# Altium PCB PCB1_test.PcbDoc
Units mm, origin at the board's own origin, x right, y up, seen from the top; angles counter-clockwise.
Board outline 145 x 100 mm, 2 copper layers (Top Layer, Bottom Layer); 78 components, 96 nets, 335 pads, 35 vias.
Unrouted connection lines stored in the file: 47.
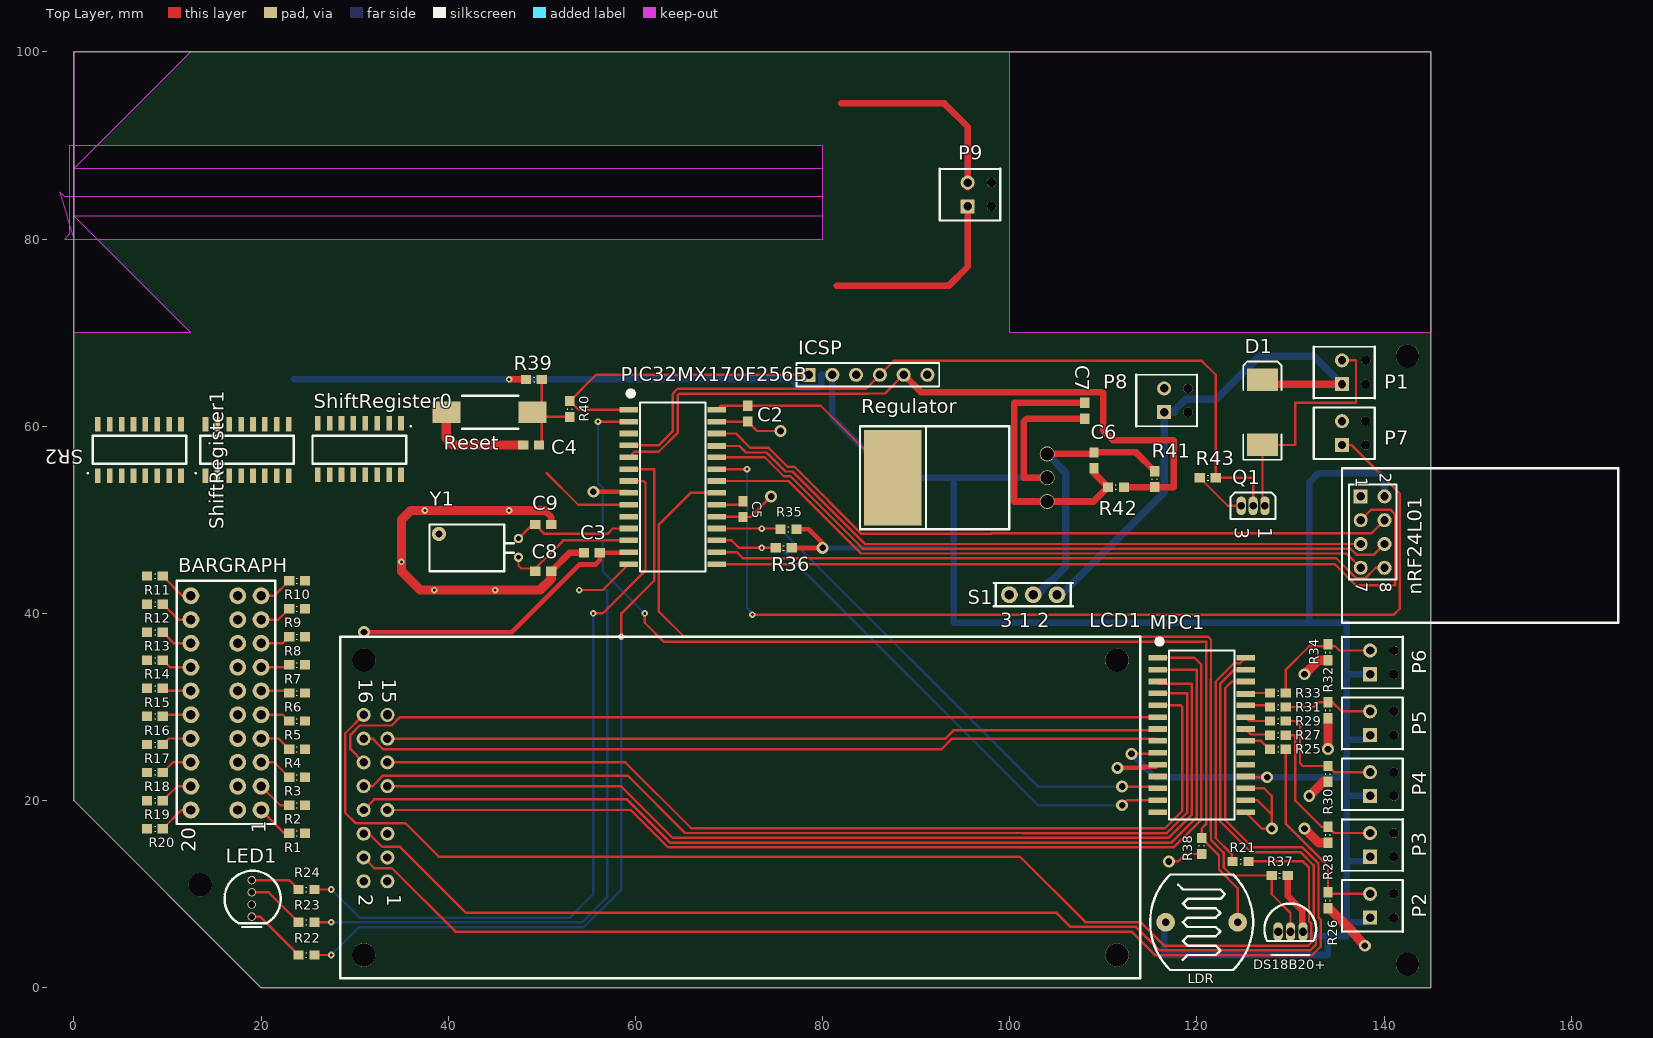
[diagram p0: Top Layer view]
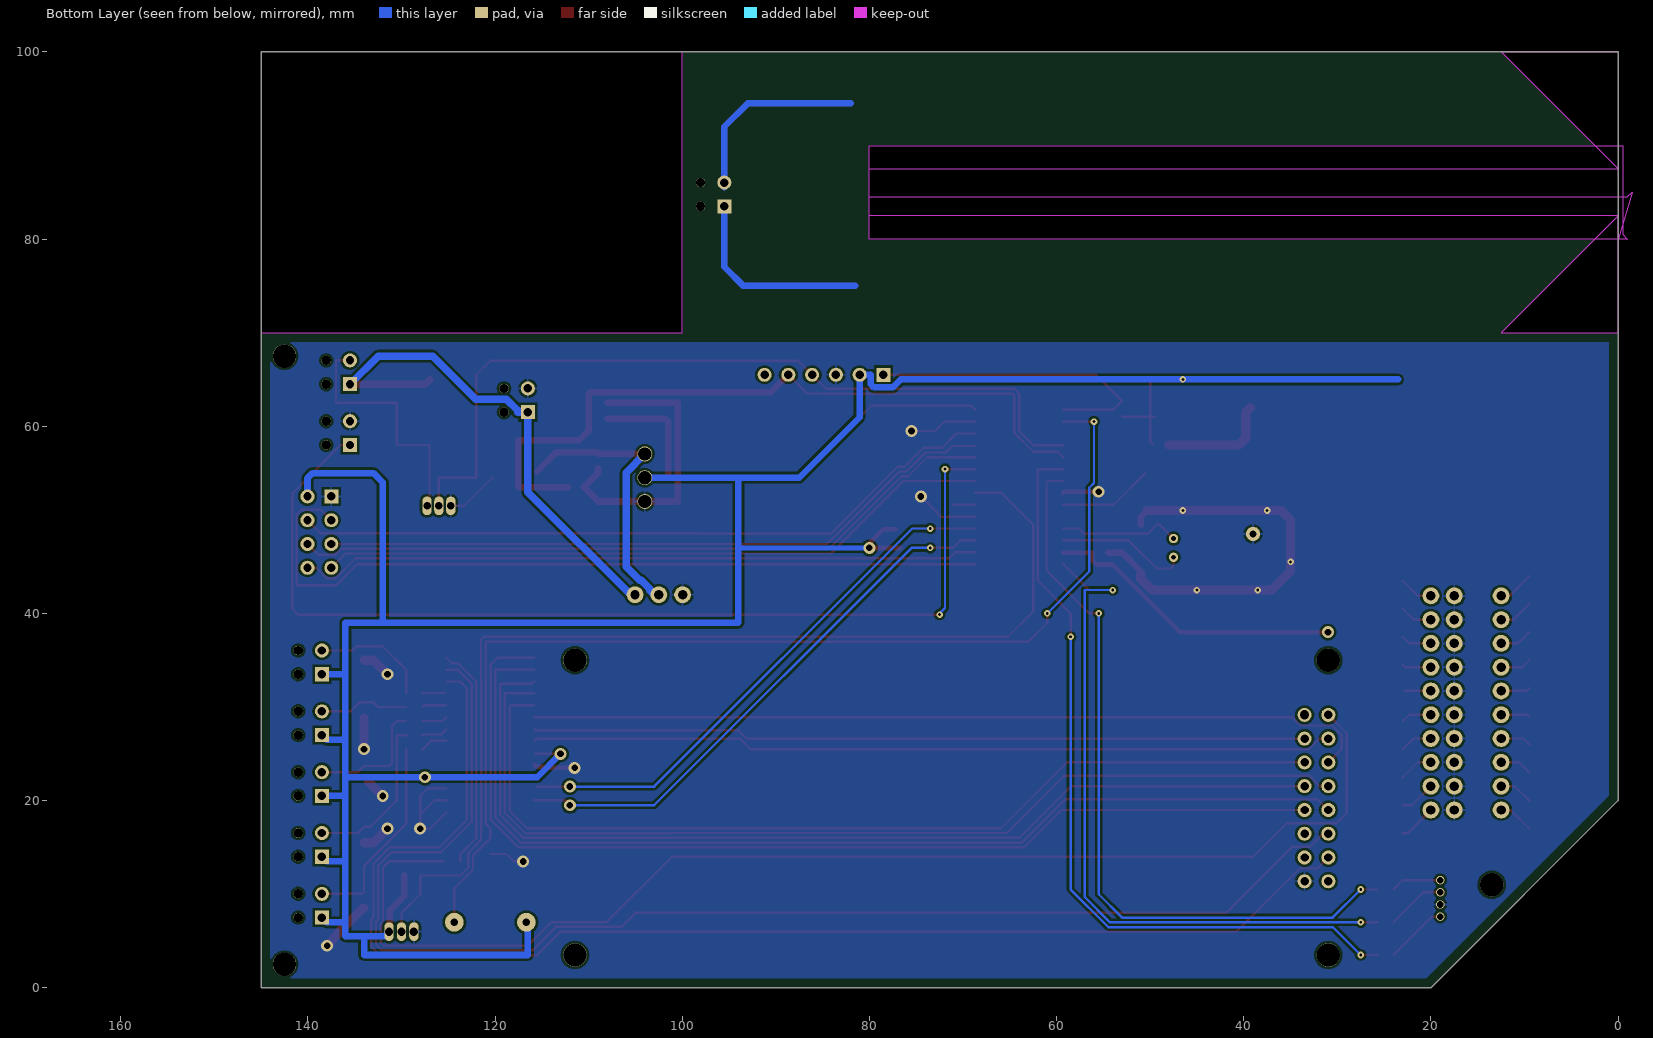
[diagram p1: Bottom Layer view, seen from below]

## Layer stack, top to bottom
Top Solder: solder mask 0.0102, Solder Resist, Dk 3.5
Top Layer: signal copper 0.0356
Dielectric 1: dielectric 0.32, FR-4, Dk 4.8
Bottom Layer: signal copper 0.0356
Bottom Solder: solder mask 0.0102, Solder Resist, Dk 3.5

## Board outline
20,0 145,0 145,100 0,100 0,20
cut-out: 80,80 80,90 -0.5,90 -0.5,80.5 -1,80
cut-out: 0,80 80,80 80,84.5 -1,84.5 -1.5,85
cut-out: 0,87.5 0,82.5 80,82.5 80,87.5
cut-out: 145,70 100,70 100,100 145,100
cut-out: 0,82.5 12.5,70 0,70
cut-out: 0,87.5 12.5,100 0,100
board region "Default Layer Stack Region": 145,70 145,0 20,0 0,20 0,70
board region "Default Layer Stack Region": 0,70 0,100 145,100 145,70

## Design rules (kind name [scope] priority, off if disabled: settings)
Clearance [All] p1: gap=0.254
PlaneClearance [All] p1 off: clearance=0.508
PlaneConnect isvia [IsVia] p1: planeconnectstyle=NoConnect reliefexpansion=0.508 reliefentries=4 reliefconductorwidth=0.254 reliefairgap=0.254
PlaneConnect all [IsPad] p2: planeconnectstyle=Relief reliefexpansion=0.508 reliefentries=4 reliefconductorwidth=0.254 reliefairgap=0.254
PolygonConnect PolygonConnect_2 [IsVia vs InNet('GND')] p1: connectstyle=Direct reliefconductorwidth=0.254 reliefentries=2 polygonreliefangle="90 Angle" airgapwidth=0.254
PolygonConnect PolygonConnect_1 [IsPad vs InNet('GND')] p2: connectstyle=Relief reliefconductorwidth=0.254 reliefentries=4 polygonreliefangle="90 Angle" airgapwidth=0.254
PolygonConnect [All] p3 off: connectstyle=Relief reliefconductorwidth=0.254 reliefentries=4 polygonreliefangle="90 Angle" airgapwidth=0.254
RoutingVias [All] p1: holewidth=0.711 width=1.27 viastyle="Through Hole" minholewidth=0.711 minwidth=1.27 maxholewidth=0.711 maxwidth=1.27
SolderMaskExpansion [All] p1: expansion=0.102
UnpouredPolygon [All] p1: allowunpoured=FALSE
Width [All] p1: maxlimit=20 minlimit=0.2 preferedwidth=0.254
27 further rules are at their usual default settings.

## Classes and differential pairs
net class SPI[0..3]: SPI0 SPI1 SPI2 SPI3
net class RD[0..2]: RD0 RD1 RD2
net class LED[0..2]: LED0 LED1 LED2
net class LCD[0..10]: LCD0 LCD1 LCD2 LCD3 LCD4 LCD5 LCD6 LCD7 LCD8 LCD9 LCD10
net class I2C[0..1]: I2C0 I2C1
net class ELECTRODE[0..4]: ELECTRODE0 ELECTRODE1 ELECTRODE2 ELECTRODE3 ELECTRODE4
component class TempSensor: DS18B20+ R37
component class SoilMoisture: P7
component class Pump: D1 P1 PUMP Q1 R43
component class Power: C6 C7 P8 R41 R42 Regulator S1
component class PIC32MX170F256B: C2 C3 C4 C5 C8 C9 ICSP PIC32MX170F256B R39 R40 Reset Y1
component class ModRadio: Nrf24L01
component class MCP23017: R35 R36
component class LumSensor: LDR R38
component class "Level Sensor": P2 P3 P4 P5 P6 R25 R26 R27 R28 R29 R30 R31 R32 R33 R34
component class LedAlert: R22 R23 R24
component class "Ecran LCD": R21
component class BarGraph: BARGRAPH R1 R2 R3 R4 R5 R6 R7 R8 R9 R10 R11 R12 R13 R14 R15 R16 R17 R18 R19 R20 ShiftRegister0 ShiftRegister1 SR2

## Components (designator, comment, footprint, x,y, rotation, side; value= is the part's Value field where it differs from the comment)
BARGRAPH "BargraphRG" BargraphRG 17.5,19 r90 top
C2 "0.1uF" C0603 72,60.5 r90 top
C3 "0.1uF" C0603 54.5,46.5 r0 top
C4 "0.1uF" C0603 48,58 r0 top
C5 "10uF" C0603 71.5,52 r270 top
C6 "10uF" C0603 109,55.5 r90 top
C7 "100nF" C0603 108,62.5 r270 top
C8 "15pF" C0603 51,44.5 r180 top
C9 "15pF" C0603 51,49.5 r180 top
D1 "Diode" SMC 127,61.5 r90 top
DS18B20+ "DS18B20+" DS18B20+ 130,6 r0 top
ICSP "Program/Debug" HDR1X6 78.5,65.5 r0 top
LCD1 "FC1602B04-FHYYBW-91LE" FC1602B04-FHYYBW-91LE 33.5,19 r270 top
LDR "NSL-4962" NSL-4962 120.5,7 r0 top
LED1 "LED_RGB" LED1 19,9.5 r270 top
MPC1 "MPC23017" MCP23017 120.5,29 r270 top
nRF24L01 "Nrf24L01" NRF24L01 137.5,52.5 r270 top (schematic designator Nrf24L01)
P1 "Header Pompe" BORNIER 135.5,64.5 r90 top
P2 "Header 2" BORNIER 138.5,7.5 r90 top
P3 "Header 2" BORNIER 138.5,14 r90 top
P4 "Header 2" BORNIER 138.5,20.5 r90 top
P5 "Header 2" BORNIER 138.5,27 r90 top
P6 "Header 2" BORNIER 138.5,33.5 r90 top
P7 "Header Sensor" BORNIER 135.5,58 r90 top
P8 "Header BAT" BORNIER 116.5,61.5 r90 top
P9 "Header 2" BORNIER 95.5,83.5 r90 top
PIC32MX170F256B "PIC32MX170F256B" PIC32MX170F256B 64,55.5 r270 top (schematic designator PIC32)
Q1 "IRFZ24N" E3 126,51.5 r270 top
R1 "220Ω" R0603 23,16.5 r0 top
R2 "220Ω" R0603 23,19.5 r0 top
R3 "220Ω" R0603 23,22.5 r0 top
R4 "220Ω" R0603 23,25.5 r0 top
R5 "220Ω" R0603 23,28.5 r0 top
R6 "220Ω" R0603 23,31.5 r0 top
R7 "220Ω" R0603 23,34.5 r0 top
R8 "220Ω" R0603 23,37.5 r0 top
R9 "220Ω" R0603 23,40.5 r0 top
R10 "220Ω" R0603 23,43.5 r0 top
R11 "160Ω" R0603 9.5,44 r180 top
R12 "160Ω" R0603 9.5,41 r180 top
R13 "160Ω" R0603 9.5,38 r180 top
R14 "160Ω" R0603 9.5,35 r180 top
R15 "160Ω" R0603 9.5,32 r180 top
R16 "160Ω" R0603 9.5,29 r180 top
R17 "160Ω" R0603 9.5,26 r180 top
R18 "160Ω" R0603 9.5,23 r180 top
R19 "160Ω" R0603 9.5,20 r180 top
R20 "160Ω" R0603 9.5,17 r180 top
R21 "600Ω" R0603 125.5,13.5 r180 top
R22 "140Ω" R0603 24,3.5 r0 top
R23 "20Ω" R0603 24,7 r0 top
R24 "30Ω" R0603 24,10.5 r0 top
R25 "1KΩ" R0603 129.5,25.5 r180 top
R26 "10MΩ" R0603 134,8.5 r90 top
R27 "1KΩ" R0603 129.5,27 r180 top
R28 "10MΩ" R0603 134,15.5 r90 top
R29 "1KΩ" R0603 129.5,28.5 r180 top
R30 "10MΩ" R0603 134,22 r90 top
R31 "1KΩ" R0603 129.5,30 r180 top
R32 "10MΩ" R0603 134,28.8 r90 top
R33 "1KΩ" R0603 129.5,31.5 r180 top
R34 "10MΩ" R0603 134,35 r90 top
R35 "4.7KΩ" R0603 75.5,49 r0 top
R36 "4.7KΩ" R0603 75,47 r0 top
R37 "4.7K" R0603 128,12 r0 top
R38 "Res1" R0603 120.5,16 r270 top
R39 "10K" R0603 50,65 r180 top
R40 "1K" R0603 53,61 r90 top
R41 "2M" R0603 115.5,53.5 r90 top
R42 "1M" R0603 110.5,53.5 r0 top
R43 "10K" R0603 122,54.5 r180 top
Regulator "LM1117D-33" VoltReg3.3V 104,54.5 r90 top
Reset "SW-PB" Reset 49,61.5 r180 top
S1 "SW-On/Off" "Switch on/off" 102.5,42 r180 top
ShiftRegister0 "74HC595" SN74HC595D 30.5,57.5 r180 top (schematic designator SR0)
ShiftRegister1 "74HC595" SN74HC595D 18.5,57.5 r0 top (schematic designator SR1)
SR2 "74HC595" SN74HC595D 7,57.5 r0 top
Y1 "32.768kHz" XTAL 47.5,47 r90 top

## Footprints (in the part's own frame and the unit in brackets; to place one, negate y for a bottom-side part, rotate by r counter-clockwise, add the part's x,y. Pads: shape width x height; smd on the part's side, far side on the other; paste and mask are expansions set on the pad)
BargraphRG [mm]
  round 1.8 hole 1: 1(0,-2.5) 2(2.54,-2.5) 3(5.1,-2.5) 4(7.64,-2.5) 5(10.18,-2.5) 6(12.72,-2.5) 7(15.26,-2.5) 8(17.8,-2.5) 9(20.34,-2.5) 10(22.88,-2.5) 11(22.88,5) 12(20.34,5) 13(17.8,5) 14(15.26,5) 15(12.72,5) 16(10.18,5) 17(7.64,5) 18(5.1,5) 19(2.54,5) 20(0,5) 21(0,0) 22(2.54,0) 23(5.1,0) 24(7.64,0) 25(10.18,0) 26(12.72,0) 27(15.26,0) 28(17.8,0) 29(20.34,0) 30(22.88,0)
  silkscreen extent -1.5,-4 24.5,6.5
BORNIER [mm]
  rect 1.5x1.5 hole 0.9: 1(0,0)
  round 1.5 hole 0.9: 2(2.54,0)
  round 1 hole 1: NC(0,-2.54) NC(2.54,-2.54)
  silkscreen extent -1.5,-3.5 4,3
C0603 [mm]
  rect 1.1x1 smd: 1(0,0) 2(1.7,0)
DS18B20+ [mm] "DS18B20+"
  oval 1x2 hole 0.9: 1(-1.33,0) 2(0,0) 3(1.33,0)
  silkscreen extent -2.79,-2.5 2.74,3
E3 [mm] "TO, Flat Index; 3 In-Line, Axial Leads; Body Dia. 4.6mm; Lead Dia. 0.5 mm (max)"
  oval 2x1 hole 0.8: 1(0,1.27) 2(0,0) 3(0,-1.27)
  silkscreen extent -1.41,-2.41 1.41,2.41
FC1602B04-FHYYBW-91LE [mm] "LCD"
  round 1.5 hole 0.9: 1(7.62,0) 2(7.62,-2.54) 3(5.08,0) 4(5.08,-2.54) 5(2.54,0) 6(2.54,-2.54) 7(0,0) 8(0,-2.54) 9(-2.54,0) 10(-2.54,-2.54) 11(-5.08,0) 12(-5.08,-2.54) 13(-7.62,0) 14(-7.62,-2.54) 16(-10.16,-2.54)
  round 1.5 hole 1: 15(-10.16,0)
  round 2.5 hole 2.5: NC(-16,77.96) NC(-16,-2.54) NC(15.5,77.96) NC(15.5,-2.54)
  silkscreen extent -18.5,-5.04 18,80.46
HDR1X6 [mm] "Connector; Header; 6 Position"
  rect 1.5x1.5 hole 0.9: 1(0,0)
  round 1.5 hole 0.9: 2(2.54,0) 3(5.08,0) 4(7.62,0) 5(10.16,0) 6(12.7,0)
  silkscreen extent -1.27,-1.27 13.97,1.27
LED1 [mm] "LedRGB"
  round 0.9 hole 0.7: 1(1.9,0) 2(0.6,0) 3(-0.7,0) 4(-2,0)
  silkscreen extent -3,-2.9 3,3.1
MCP23017 [mm]
  rect 0.6x2 smd: 1(-6.27,-4.7) 2(-5,-4.7) 3(-3.73,-4.7) 4(-2.46,-4.7) 5(-1.19,-4.7) 6(0.08,-4.7) 7(1.35,-4.7) 8(2.62,-4.7) 9(3.89,-4.7) 10(5.16,-4.7) 11(6.43,-4.7) 12(7.7,-4.7) 13(8.97,-4.7) 14(10.24,-4.7) 15(10.24,4.7) 16(8.97,4.7) 17(7.7,4.7) 18(6.43,4.7) 19(5.16,4.7) 20(3.89,4.7) 21(2.62,4.7) 22(1.35,4.7) 23(0.08,4.7) 24(-1.19,4.7) 25(-2.39,4.7) 26(-3.73,4.7) 27(-5,4.7) 28(-6.27,4.7)
  silkscreen extent -8.05,-4.55 11.01,3.5
NRF24L01 [mm]
  rect 1.5x1.5 hole 0.9: 1(0,0)
  round 1.5 hole 0.9: 2(0,2.54) 3(2.54,0) 4(2.54,2.54) 5(5.08,0) 6(5.08,2.54) 7(7.62,0) 8(7.62,2.54)
  silkscreen extent -3,-2 13.5,27.5
NSL-4962 [mm]
  round 2 hole 0.8: 1(-3.85,0) 2(3.85,0)
  silkscreen extent -5.5,-5.1 5.5,5.1
PIC32MX170F256B [mm]
  rect 0.6x2 smd: 1(-6.27,-4.7) 2(-5,-4.7) 3(-3.73,-4.7) 4(-2.46,-4.7) 5(-1.19,-4.7) 6(0.08,-4.7) 7(1.35,-4.7) 8(2.62,-4.7) 9(3.89,-4.7) 10(5.16,-4.7) 11(6.43,-4.7) 12(7.7,-4.7) 13(8.97,-4.7) 14(10.24,-4.7) 15(10.24,4.7) 16(8.97,4.7) 17(7.7,4.7) 18(6.43,4.7) 19(5.16,4.7) 20(3.89,4.7) 21(2.62,4.7) 22(1.35,4.7) 23(0.08,4.7) 24(-1.19,4.7) 25(-2.39,4.7) 26(-3.73,4.7) 27(-5,4.7) 28(-6.27,4.7)
  silkscreen extent -8.05,-4.55 11.01,3.5
R0603 [mm]
  rect 1.1x1 smd: 1(0,0) 2(1.7,0)
  silkscreen extent 0.76,-0.25 0.89,0.25
Reset [mm]
  rect 3x2.3 smd: 1(0,0) 2(9.2,0)
  silkscreen extent 1.5,-1.75 7.5,1.75
SMC [mm] "DO-214-AB/SMC; 2 C-Bend Leads; Body 7.9 x 5.9 mm, inc. leads (LxW)"
  rect 2.4x3.3 smd: 1(-3.475,0) 2(3.475,0)
  silkscreen extent -5.07,-2.05 5.43,2.05
SN74HC595D [mm]
  rect 0.6x1.55 smd: 1(-4.445,-2.8) 2(-3.175,-2.8) 3(-1.905,-2.8) 4(-0.635,-2.8) 5(0.635,-2.8) 6(1.905,-2.8) 7(3.175,-2.8) 8(4.445,-2.8) 9(4.445,2.7) 10(3.175,2.7) 11(1.905,2.7) 12(0.635,2.7) 13(-0.635,2.7) 14(-1.905,2.7) 15(-3.175,2.7) 16(-4.445,2.7)
  silkscreen extent -5.51,-2.5 5,1.5
"Switch on/off" [mm]
  round 1.8 hole 1: 1(0,0) 2(-2.54,0) 3(2.54,0)
  silkscreen extent -4.21,-1.25 4.21,1.25
VoltReg3.3V [mm]
  round 1.6 hole 1.4: 1(-2.54,0) 2(0,0) 3(2.54,0)
  rect 10.16x6.1 smd: 4(0,16.5)
  silkscreen extent -5.5,4.06 5.5,20
XTAL [mm]
  round 1 hole 0.5: 1(-1,0) 2(1,0)
  silkscreen extent -2.5,0.5 2.5,9.5

## Part data
C2 C3 C4 C5 C6 C7 C8 C9: library part Cap, "Capacitor"
D1: "Default Diode"
ICSP: library part "Header 6", "Header, 6-Pin"
nRF24L01: library part "Header 4X2", "Header, 4-Pin, Dual row"
P1 P7 P8: library part "Header 2", "Header, 2-Pin"
P2 P3 P4 P5 P6 P9: "Header, 2-Pin"
Q1: library part MOSFET-N, "N-Channel MOSFET"
R1 R2 R3 R4 R5 R6 R7 R8 R9 R10 R11 R12 R13 R14 R15 R16 R17 R18 R19 R20 R21 R22 R23 R24 R25 R26 R27 R28 R29 R30 R31 R32 R33 R34 R35 R36 R37 R39 R40 R41 R42 R43: library part Res1, "Resistor"
R38: "Resistor"
Reset: "Switch"
S1: library part SW-SPDT, "SPDT Subminiature Toggle Switch, Right Angle Mounting, Vertical Actuation"
Y1: library part XTAL, "Crystal Oscillator"

## Free pads (board coordinates)
  round 2.5 hole 2.5: 0(13.5,11) 0(142.5,2.5) 0(142.5,67.5)
  round 1.524 hole 0.762: 1(39,48.5)

## Via types
v1: diameter 0.7, hole 0.3, Top Layer to Bottom Layer, 18 vias
v2: diameter 1.27, hole 0.711, Top Layer to Bottom Layer, 17 vias

## Nets (pads, with @x,y where several pads share a name; then routed paths per layer and width w, separated by ;. In a path a pad name is that pad's centre, name@x,y a point inside that pad or via, vN(x,y) a via of type N, cw(c..) or ccw(c..) an arc to the next point about the centre after c; other vN are vias at no path point)
3.3V: C2.2 C3.2 C7.2 DS18B20+.3 ICSP.2 LCD1.2 LCD1.5 LCD1.15 LDR.1 MPC1.9 MPC1.18 nRF24L01.2 P2.1 P3.1 P4.1 P5.1 P6.1 PIC32MX170F256B.13 PIC32MX170F256B.28 R35.2 R36.2 R37.2 R39.2 Regulator.2 Regulator.4 ShiftRegister0.10 ShiftRegister0.16 ShiftRegister1.10 ShiftRegister1.16 SR2.10 SR2.16 | length 375.1
  Top Layer w0.254: PIC32MX170F256B.28 69.13,62.2 C2.2 79.8,62.2 Regulator.4 ; v2(113,25) MPC1.9@115.69,25 ; MPC1.18@125.27,22.5 v2(127.5,22.5)
  Top Layer w0.5: v2(31,38) 46.786,38 52.054,43.268 54.012,45.226 55.726,45.226 56.2,45.7 C3.2 PIC32MX170F256B.13@59.27,46.5 ; R36.2 v2(80,47) 80,47.5 78.5,49 R35.2
  Top Layer w0.7: v1(46.5,65) R39.2 ; Regulator.2 101.5,54.5 101.5,60.5 101.8,60.8 C7.2 ; R37.2 129.7,9.8 131.245,8.255 131.245,6.085 DS18B20+.3
  Bottom Layer w0.5: v2(80,47) 94,47
  Bottom Layer w0.7: 23.5,65 v1(46.5,65) 76.646,65 77.5,64.146 79.5,64.146 79.854,64.5 79.854,65.5 ICSP.2 81.04,60.96 87.5,54.5 94,54.5 ; Regulator.2 94,54.5 ; v2(113,25) 115.5,22.5 v2(127.5,22.5) 136,22.5 ; LDR.1 116.5,6.85 116.5,3.5 134,3.5 134,5.5 ; DS18B20+.3 131.83,5.5 134,5.5 ; P2.1 138,7 136,7 ; P3.1 138,13.5 136,13.5 ; P4.1 136,20.5 ; P5.1 138,26.5 136,26.5 ; P6.1 136,33.5 ; nRF24L01.2 140.04,54.46 139.5,55 133,55 132,54 132,39 ; 94,54.5 94,47 94,39 132,39 ; 132,39 136,39 136,33.5 ; 134,5.5 136,5.5 136,7 ; 136,7 136,13.5 ; 136,13.5 136,20.5 ; 136,20.5 136,22.5 ; 136,22.5 136,26.5 ; 136,26.5 136,33.5
7.4V: D1.2 P1.1 P8.1 S1.2 | length 56.8
  Top Layer w0.8: D1.2 127.475,64.5 P1.1
  Bottom Layer w0.254: S1.2@105.04,41.5 S1.2@105.04,42.04
  Bottom Layer w0.8: S1.2@105.04,41.5 116.5,52.96 P8.1 117.6,61.5 117.6,61.692 118.794,62.886 122.058,62.886 126.672,67.5 132.5,67.5 P1.1
"BAT. LVL.": ICSP.5 PIC32MX170F256B.5 R41.1 R42.2 | length 79.7
  Top Layer w0.254: PIC32MX170F256B.5 59.889,57.279 62.497,57.279 64.508,59.29 64.508,63.29 64.71,63.492 84.83,63.492 84.838,63.5 86.66,63.5 ICSP.5
  Top Layer w0.7: ICSP.5 90.506,63.654 109.846,63.654 110,63.5 110,59.5 111,58.5 117.5,58.5 117.5,53.5 R41.1 R42.2
CE: nRF24L01.3 PIC32MX170F256B.15 | length 85.3
  Top Layer w0.254: PIC32MX170F256B.15 134.74,45.26 137,43 141.171,43 141.171,50.599 140.679,51.091 138.631,51.091 nRF24L01.3
ELECTRODE0: MPC1.21 R25.2 | length 3
  Top Layer w0.254: MPC1.21 126.831,26.38 127.711,25.5 R25.2
ELECTRODE1: MPC1.22 R27.2 | length 2.9
  Top Layer w0.254: MPC1.22 125.789,27.061 127.8,27.061 R27.2
ELECTRODE2: MPC1.23 R29.2 | length 2.8
  Top Layer w0.254: MPC1.23 125.62,28.5 R29.2
ELECTRODE3: MPC1.24 R31.2 | length 2.7
  Top Layer w0.254: MPC1.24 127.61,30.19 R31.2
ELECTRODE4: MPC1.25 R33.2 | length 2.5
  Top Layer w0.254: MPC1.25@125.31,31.5 R33.2
GND: BARGRAPH.21 BARGRAPH.22 BARGRAPH.23 BARGRAPH.24 BARGRAPH.25 BARGRAPH.26 BARGRAPH.27 BARGRAPH.28 BARGRAPH.29 BARGRAPH.30 C2.1 C3.1 C4.1 C5.2 C6.1 C7.1 C8.1 C9.1 DS18B20+.1 ICSP.3 LCD1.1 LED1.2 MPC1.10 MPC1.15 MPC1.16 MPC1.17 nRF24L01.1 P7.2 P8.2 pad.1 PIC32MX170F256B.8 PIC32MX170F256B.19 PIC32MX170F256B.27 Q1.3 R26.1 R28.1 R30.1 R32.1 R34.1 R38.2 R42.1 R43.2 Regulator.1 Reset.2 S1.3 ShiftRegister0.8 ShiftRegister0.13 ShiftRegister1.8 ShiftRegister1.13 SR2.8 SR2.13 | length 151.3
  Top Layer w0.254: PIC32MX170F256B.19 C5.2@71.46,50.34 ; PIC32MX170F256B.27 C2.1 73,59.5 v2(75.5,59.5) ; C5.2 72.3,50.3 v2(74.5,52.5) ; 100.46,51.96 100.5,52 ; v2(117,13.5) 118,13.5 118.8,14.3 R38.2 ; R43.2 123.3,51.5 Q1.3 ; MPC1.15 126.96,17 v2(128,17) 128,18.5 ; MPC1.16 126.47,20.03 128,18.5 ; MPC1.17 127.2,21.3 128,20.5 128,18.5
  Top Layer w0.5: v2(55.5,53) 59.18,53 PIC32MX170F256B.8 ; v2(111.5,23.5) 114.364,23.5 114.364,23.624 115.584,23.624 MPC1.10
  Top Layer w0.7: 50.292,51 51,50.292 C9.1 ; C8.1 53,46.5 C3.1 ; 100.46,51.96 Regulator.1 108.96,51.96 R42.1 109,55 C6.1 ; 100.5,52 100.5,62.5 C7.1
  Top Layer w1: Reset.2@39.3,62 Reset.2 39.8,58.7 40.5,58 C4.1 ; 50.292,51 v1(46.5,51) v1(37.5,51) 36,51 35,50 v1(35,45.5) 35,44.5 37,42.5 49.812,42.5 51,43.688 C8.1@51,44.296 ; v2(131.5,17) 133,15.5 R28.1 ; v2(131.5,33.5) 133,35 R34.1 ; v2(132,20.5) 133.5,22 ; R26.1 134.108,8.5 136.608,6 137.934,4.5 v2(137.938,4.496) ; v2(134,25.5) R32.1
  other v1: 38.5,42.5 45,42.5
I2C0: MPC1.12 PIC32MX170F256B.18 R35.1 | length 60.2
  Top Layer w0.254: PIC32MX170F256B.18 v1(73.5,49.07) R35.1@75.43,49.07 ; v2(112,21.5) MPC1.12@115.6,21.5
  Bottom Layer w0.254: v1(73.5,49.07) 75.43,49.07 103,21.5 v2(112,21.5)
I2C1: MPC1.13 PIC32MX170F256B.17 R36.1 | length 60.5
  Top Layer w0.254: PIC32MX170F256B.17 70.3,47.8 71.1,47 v1(73.5,47) R36.1 ; v2(112,19.5) 112.53,20.03 MPC1.13
  Bottom Layer w0.254: v1(73.5,47) 75.5,47 103,19.5 v2(112,19.5)
LCD0: LCD1.7 MPC1.1 | length 111.4
  Top Layer w0.254: LCD1.7 59.5,19 63.492,15.008 100.806,15.008 100.814,15 117.5,15 120.476,17.976 120.476,34.524 119.73,35.27 MPC1.1
LCD1: LCD1.8 MPC1.2 | length 112.5
  Top Layer w0.254: LCD1.8 32.091,20.131 59.087,20.131 63.702,15.516 101.016,15.516 101.024,15.508 117.29,15.508 119.968,18.186 119.968,34 MPC1.2
LCD2: LCD1.9 MPC1.3 | length 107
  Top Layer w0.254: LCD1.9 58.46,21.54 63.976,16.024 101.226,16.024 101.234,16.016 116.976,16.016 119.46,18.5 119.46,32.5 116.03,32.5 MPC1.3
LCD3: LCD1.10 MPC1.4 | length 107.9
  Top Layer w0.254: LCD1.10 31.901,21.54 33.032,22.671 59.171,22.671 65.31,16.532 101.437,16.532 101.445,16.524 116.766,16.524 118.952,18.71 118.952,31.5 118.912,31.46 MPC1.4
LCD4: LCD1.11 MPC1.5 | length 102.4
  Top Layer w0.254: LCD1.11 58.92,24.08 65.96,17.04 101.647,17.04 101.655,17.032 116.555,17.032 118.444,18.921 118.444,30 118.254,30.19 MPC1.5
LCD5: LCD1.12 MPC1.6 | length 90.6
  Top Layer w0.254: LCD1.12 29.54,25.5 29.54,27.022 30.547,28.029 33.968,28.029 34.859,28.92 MPC1.6
LCD6: LCD1.13 MPC1.7 | length 82.7
  Top Layer w0.254: LCD1.13 93.12,26.62 94,27.5 115.65,27.5 MPC1.7
LCD7: LCD1.14 MPC1.8 | length 85.9
  Top Layer w0.254: LCD1.14 31.901,26.62 33.032,25.489 92.707,25.489 93.838,26.62 115.56,26.62 MPC1.8
LCD8: LCD1.4 MPC1.26 | length 144.4
  Top Layer w0.254: LCD1.4 32.091,12.789 33.968,12.789 40.757,6 113,6 115.508,3.492 132.329,3.492 ; MPC1.26 123.73,32.73 123.016,32.016 123.016,17.944 125.96,15 131.282,15 132.992,13.29 132.992,7.521 133.227,7.286 133.227,4.398 132.325,3.496
LCD9: LCD1.6 MPC1.27 | length 145.7
  Top Layer w0.254: LCD1.6 31.54,16.46 32.949,15.051 34.858,15.051 41.909,8 105,8 106.492,6.508 113.5,6.508 116.008,4 132.111,4 132.719,4.608 132.719,7.075 132.484,7.31 132.484,13.079 131.071,14.492 125.75,14.492 122.508,17.734 122.508,32.508 124,34 MPC1.27
LCD10: MPC1.28 R21.2 | length 24.2
  Top Layer w0.254: R21.2@123.7,13.5 123.7,14.3 122.016,15.984 122.016,16.921 122,16.937 122,32.718 123.963,34.681 124.611,34.681 MPC1.28
LED0: PIC32MX170F256B.6 R22.2 | length 84.8
  Top Layer w0.254: R22.2 v1(27.5,3.5) ; v1(58.5,37.5) 58.5,40 62,43.5 62,55.42 PIC32MX170F256B.6
  Bottom Layer w0.254: v1(27.5,3.5) 30.484,6.484 54.484,6.484 58.5,10.5 v1(58.5,37.5)
LED1: PIC32MX170F256B.14 R23.2 | length 74.7
  Top Layer w0.254: R23.2 v1(27.5,7) ; v1(54,42.5) 56.5,42.5 59.3,45.3 PIC32MX170F256B.14
  Bottom Layer w0.254: v1(27.5,7) 27.508,7.008 30.274,7.008 30.29,6.992 54.274,6.992 57,9.718 57,42.5 v1(54,42.5)
LED2: PIC32MX170F256B.7 R24.2 | length 80.8
  Top Layer w0.254: R24.2 v1(27.5,10.5) ; v1(55.5,40) 56.5,40 61.072,44.572 61.072,53.928 60.85,54.15 PIC32MX170F256B.7
  Bottom Layer w0.254: v1(27.5,10.5) 30.5,7.5 53,7.5 55.5,10 v1(55.5,40)
LUM: LDR.2 PIC32MX170F256B.2 R38.1 | length 119.5
  Top Layer w0.254: v1(56,60.5) PIC32MX170F256B.2 ; v1(61,40) 61,39 63.008,36.992 120.984,36.992 120.984,17.484 120.5,17 R38.1 122.361,14.139 122.361,12.632 124.35,10.643 LDR.2
  Bottom Layer w0.254: v1(56,60.5) 56,53.937 56.516,53.421 56.516,44.484 v1(61,40)
MCLR: ICSP.1 PIC32MX170F256B.1 R40.2 | length 33.3
  Top Layer w0.254: PIC32MX170F256B.1 53.93,61.77 R40.2 55.8,65.5 ICSP.1
MOISTSENSOR: P7.1 PIC32MX170F256B.23 | length 109.1
  Top Layer w0.254: PIC32MX170F256B.23 v1(71.92,55.42) ; v1(72.5,39.875) 141.054,39.875 141.679,40.5 141.679,52.821 136.5,58 P7.1
  Bottom Layer w0.254: v1(71.92,55.42) 71.92,40.58 72.5,40 v1(72.5,39.875)
NetBARGRAPH_1: BARGRAPH.1 R1.1 | length 4
  Top Layer w0.254: BARGRAPH.1 22.5,16.5 R1.1
NetBARGRAPH_2: BARGRAPH.2 R2.1 | length 3.8
  Top Layer w0.254: BARGRAPH.2 22.04,19.5 R2.1
NetBARGRAPH_3: BARGRAPH.3 R3.1 | length 3.7
  Top Layer w0.254: BARGRAPH.3 21.4,24.1 R3.1
NetBARGRAPH_4: BARGRAPH.4 R4.1 | length 3.5
  Top Layer w0.254: BARGRAPH.4 21.86,26.64 R4.1
NetBARGRAPH_5: BARGRAPH.5 R5.1 | length 3.3
  Top Layer w0.254: BARGRAPH.5 22.32,29.18 R5.1
NetBARGRAPH_6: BARGRAPH.6 R6.1 | length 2.8
  Top Layer w0.254: BARGRAPH.6 R6.1@22.78,31.72
NetBARGRAPH_7: BARGRAPH.7 R7.1 | length 3.1
  Top Layer w0.254: BARGRAPH.7 22.76,34.26 R7.1
NetBARGRAPH_8: BARGRAPH.8 R8.1 | length 3.3
  Top Layer w0.254: BARGRAPH.8 22.3,36.8 R8.1
NetBARGRAPH_9: BARGRAPH.9 R9.1 | length 3.5
  Top Layer w0.254: BARGRAPH.9 21.84,39.34 R9.1
NetBARGRAPH_10: BARGRAPH.10 R10.1 | length 3.7
  Top Layer w0.254: BARGRAPH.10 21.38,41.88 R10.1
NetBARGRAPH_11: BARGRAPH.11 R11.1 | length 3.9
  Top Layer w0.254: R11.1 11.62,41.88 BARGRAPH.11
NetBARGRAPH_12: BARGRAPH.12 R12.1 | length 3.7
  Top Layer w0.254: R12.1 11.16,39.34 BARGRAPH.12
NetBARGRAPH_13: BARGRAPH.13 R13.1 | length 3.5
  Top Layer w0.254: R13.1 10.7,36.8 BARGRAPH.13
NetBARGRAPH_14: BARGRAPH.14 R14.1 | length 3.3
  Top Layer w0.254: R14.1 10.24,34.26 BARGRAPH.14
NetBARGRAPH_15: BARGRAPH.15 R15.1 | length 3.1
  Top Layer w0.254: R15.1 9.78,31.72 BARGRAPH.15
NetBARGRAPH_16: BARGRAPH.16 R16.1 | length 3.1
  Top Layer w0.254: R16.1 9.68,29.18 BARGRAPH.16
NetBARGRAPH_17: BARGRAPH.17 R17.1 | length 3.3
  Top Layer w0.254: R17.1 10.14,26.64 BARGRAPH.17
NetBARGRAPH_18: BARGRAPH.18 R18.1 | length 3.5
  Top Layer w0.254: R18.1 10.6,24.1 BARGRAPH.18
NetBARGRAPH_19: BARGRAPH.19 R19.1 | length 3.6
  Top Layer w0.254: R19.1 11.04,21.54 BARGRAPH.19
NetBARGRAPH_20: BARGRAPH.20 R20.1 | length 3.8
  Top Layer w0.254: R20.1 11.5,19 BARGRAPH.20
NetC4_2: C4.2 R39.1 R40.1 Reset.1 | length 10.6
  Top Layer w0.254: Reset.1@49.5,61 Reset.1@50,61 ; C4.2 50,58.3 Reset.1@50,61 ; R39.1 Reset.1@50,61 ; R40.1 Reset.1@50,61
NetC5_1: C5.1 PIC32MX170F256B.20 | length 2.4
  Top Layer w0.254: PIC32MX170F256B.20 C5.1@71.11,51.61
NetC6_2: C6.2 R41.2 Regulator.3 S1.1 | length 30.3
  Top Layer w0.7: Regulator.3 108.84,57.04 C6.2 113.5,57.2 R41.2
  Bottom Layer w0.8: S1.1@102.5,41.5 103.486,42.486 103.486,42.644 104.396,43.554 104.554,43.554 106,45 106,55.04 Regulator.3
NetD1_1: D1.1 P1.2 Q1.1 | length 27.2
  Top Layer w0.254: Q1.1 127,51.77 D1.1 127.025,58 130.5,58 130.5,62.5 137,62.5 137,67 136.96,67.04 P1.2
NetLCD1_16: LCD1.16 R21.1 | length 135.4
  Top Layer w0.254: LCD1.16 29,27.2 29,18.682 30.091,17.591 35.409,17.591 39,14 101.095,14 108.079,7.016 113.984,7.016 116.492,4.508 131.901,4.508 132.211,4.818 132.211,6.865 131.976,7.1 131.976,12.869 131.345,13.5 R21.1
NetLED1_1: LED1.1 R22.1 | length 6.7
  Top Layer w0.254: LED1.1 19.9,7.6 R22.1
NetLED1_3: LED1.3 R23.1 | length 6.3
  Top Layer w0.254: LED1.3 20.8,10.2 R23.1
NetLED1_4: LED1.4 R24.1 | length 5.4
  Top Layer w0.254: LED1.4 23,11.5 R24.1
NetNrf24L01_8: nRF24L01.8 PIC32MX170F256B.16 | length 73
  Top Layer w0.254: PIC32MX170F256B.16 70.852,46.53 71.486,45.896 134.885,45.896 137.032,43.749 137.968,43.749 139.099,44.88 nRF24L01.8
NetP2_2: P2.2 R25.1 R26.2 | length 21.7
  Top Layer w0.254: R25.1 129.5,17.5 134,13 R26.2 134.16,10.04 P2.2
NetP3_2: P3.2 R27.1 R28.2 | length 17.4
  Top Layer w0.254: R27.1 130.5,27 130.5,20 133.3,17.2 R28.2 134.66,16.54 P3.2
NetP4_2: P4.2 R29.1 R30.2 | length 13.6
  Top Layer w0.254: R29.1 130.5,28.5 131.008,27.992 131.008,24 131.308,23.7 R30.2 134.66,23.04 P4.2
NetP5_2: P5.2 R31.1 R32.2 | length 9.6
  Top Layer w0.254: R31.1 132.5,30 133,30.5 R32.2 134.5,30.5 135.46,29.54 P5.2
NetP6_2: P6.2 R33.1 R34.2 | length 12.7
  Top Layer w0.254: R33.1 129.5,34 132,36.5 134.78,36.5 135.24,36.04 P6.2
NetR1_2: R1.2 ShiftRegister0.15
NetR2_2: R2.2 ShiftRegister0.1
NetR3_2: R3.2 ShiftRegister0.2
NetR4_2: R4.2 ShiftRegister0.3
NetR5_2: R5.2 ShiftRegister0.4
NetR6_2: R6.2 ShiftRegister0.5
NetR7_2: R7.2 ShiftRegister0.6
NetR8_2: R8.2 ShiftRegister0.7
NetR9_2: R9.2 ShiftRegister1.15
NetR10_2: R10.2 ShiftRegister1.1
NetR11_2: R11.2 ShiftRegister1.2
NetR12_2: R12.2 ShiftRegister1.3
NetR13_2: R13.2 ShiftRegister1.4
NetR14_2: R14.2 ShiftRegister1.5
NetR15_2: R15.2 ShiftRegister1.6
NetR16_2: R16.2 ShiftRegister1.7
NetR17_2: R17.2 SR2.15
NetR18_2: R18.2 SR2.1
NetR19_2: R19.2 SR2.2
NetR20_2: R20.2 SR2.3
NetShiftRegister0_9: ShiftRegister0.9 ShiftRegister1.14
NetShiftRegister1_9: ShiftRegister1.9 SR2.14
PUMP: ICSP.4 PIC32MX170F256B.4 Q1.2 R43.1 | length 87.4
  Top Layer w0.254: PIC32MX170F256B.4 62.46,57.96 64,59.5 64,63.5 64.5,64 84.62,64 ICSP.4 87.62,67 120.5,67 122,65.5 R43.1 126,54.5 Q1.2
RD0: PIC32MX170F256B.3 ShiftRegister0.14
RD1: PIC32MX170F256B.10 ShiftRegister0.12 ShiftRegister1.12 SR2.12
RD2: PIC32MX170F256B.9 ShiftRegister0.11 ShiftRegister1.11 SR2.11 | length 10.2
  Top Layer w0.254: 50.5,55 53.89,51.61 PIC32MX170F256B.9
SOSCI: C9.2 PIC32MX170F256B.11 Y1.2 | length 13.1
  Top Layer w0.254: Y1.2 49,49.5 C9.2 50.3,48.5 57,48.5 57.57,49.07 PIC32MX170F256B.11
SOSCO: C8.2 PIC32MX170F256B.12 Y1.1 | length 14.1
  Top Layer w0.254: Y1.1 47.5,45.1 47.8,44.8 49.3,44.8 52.3,47.8 PIC32MX170F256B.12
SPI0: nRF24L01.7 PIC32MX170F256B.22 | length 72.6
  Top Layer w0.254: PIC32MX170F256B.22 76.35,54.15 84.096,46.404 135.976,46.404 nRF24L01.7
SPI1: nRF24L01.6 PIC32MX170F256B.24 | length 76.1
  Top Layer w0.254: PIC32MX170F256B.24 73.81,56.69 75.842,54.658 76.56,54.658 84.306,46.912 136.409,46.912 137.032,46.289 138.909,46.289 nRF24L01.6
SPI2: nRF24L01.5 PIC32MX170F256B.25 | length 73.1
  Top Layer w0.254: PIC32MX170F256B.25 71.11,57.89 71.802,57.198 74.02,57.198 76.052,55.166 76.771,55.166 84.517,47.42 nRF24L01.5
SPI3: nRF24L01.4 PIC32MX170F256B.26 | length 76.4
  Top Layer w0.254: PIC32MX170F256B.26 70.73,59.23 72.254,57.706 74.231,57.706 76.263,55.674 76.981,55.674 84.155,48.5 98,48.5 98.051,48.551 138.631,48.551 nRF24L01.4
TEMP: DS18B20+.2 PIC32MX170F256B.21 R37.1 | length 114.4
  Top Layer w0.254: PIC32MX170F256B.21 65.88,52.88 62.508,49.508 62.508,43.29 62.5,43.282 62.5,40.218 65.218,37.5 121.194,37.5 121.5,37.194 121.5,32.945 121.492,32.937 121.492,16.726 121.508,16.71 121.508,15.774 122.869,14.413 122.869,12.842 123.711,12 R37.1 128,10 130,8 DS18B20+.2
pads on no net: ICSP.6 LCD1.3 LCD1.NC MPC1.11 MPC1.14 MPC1.19 MPC1.20 P1.NC P2.NC P3.NC P4.NC P5.NC P6.NC P7.NC P8.NC P9.1 P9.2 P9.NC SR2.4 SR2.5 SR2.6 SR2.7 SR2.9
copper on no net: | length 83.6
  Top Layer w0.7: 81.5,75 84.5,75 93.46,75 95.5,77.04 95.5,83 ; 82,94.5 86.54,94.5 93,94.5 95.5,92 95.5,91.5 95.5,85.54
  Bottom Layer w0.7: 81.5,75 82.25,75 83.75,75 84.5,75 93.46,75 95.5,77.04 95.5,83 ; 82,94.5 86.54,94.5 93,94.5 95.5,92 95.5,91.5 95.5,85.54

## Polygon pours and split planes (outlines as drawn)
GND on Bottom Layer "GND" (solid, remove dead copper, pour order 2): 1,69 144,69 144,1 20.5,1 3.5,18 1,20.5 1,69 7,63

## Text inside footprints (layer, text, board x,y; h text height)
BARGRAPH: Top Overlay "1" at 20.5,16.5 h1.52 r90; Top Overlay "20" at 13,14.5 h1.52 r90
LCD1: Top Overlay "1" at 33.46,10 h1.52 r270; Top Overlay "2" at 30.46,10 h1.52 r270; Top Overlay "15" at 32.96,33 h1.52 r270; Top Overlay "16" at 30.46,33 h1.52 r270
nRF24L01: Top Overlay "2" at 139.532,55.04 h1.27 r270; Top Overlay "1" at 136.992,54.532 h1.27 r270; Top Overlay "7" at 136.992,43.356 h1.27 r270; Top Overlay "8" at 139.532,43.356 h1.27 r270
Q1: Top Overlay "3" at 124.037,49.225 h1.5 r270; Top Overlay "1" at 126.555,49.225 h1.5 r270
S1: Top Overlay "3 1 2" at 99,38.5 h1.52